# EAGLE board untitled (EAGLE 7.3.0)
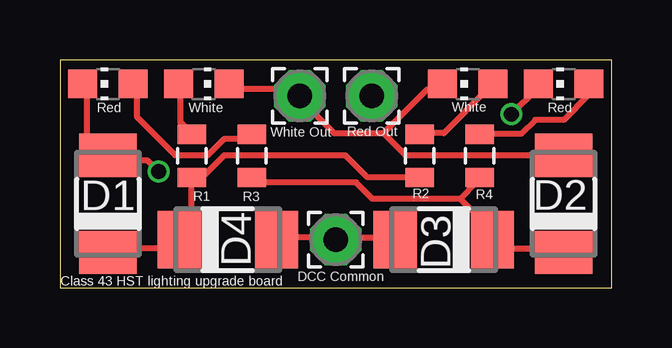
[diagram p0: board, top side]
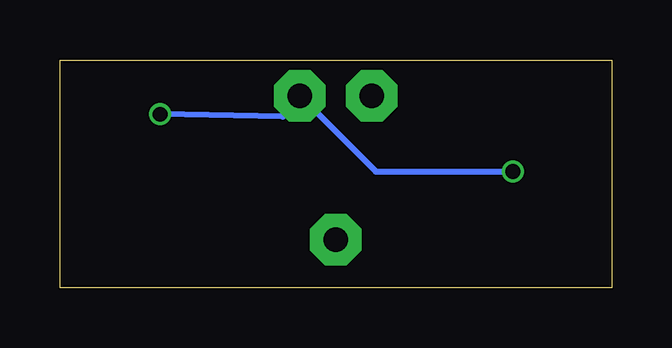
[diagram p1: board, bottom side, seen from below]

Size 23 x 9.5 mm. Coordinates in mm from the lower left corner, seen from the top.
Outline: 0,0 23,0 23,9.5 0,9.5 0,0
Copper layers (1*16): Top 0.035mm / dielectric 1.5mm / Bottom 0.035mm
Design rules "Seeed Fusion Design Rules": minimum track width 6mil, minimum drill 12mil, track to track 6mil, track to pad 6mil, pad to pad 6mil, via to via 6mil, smd to smd 0mil, copper to edge 10mil, drill to drill 10mil, minimum pad ring 10mil, minimum via ring 6mil, stop-mask expansion 2mil, vias tented up to drill 100mil, thermal gap 10mil

## Footprints (pad centres in the part's own frame; a part is rotated, then mirrored left to right if it is on the bottom)
DO-214AC = smd 1.8 x 2.4: A 2.025,0; C -2.025,0
CHIP-LED0805 = smd 1.2 x 1.2: A 0,-1.05; C 0,1.05
2,15/1,0 = drill 1.016 pad 2.159 octagon: 1 0,0
0805 = smd 0.8 x 1.2: 1 -0.9,0; 2 0.9,0

## Placement (x,y rotation side)
D1  [DO-214AC]  2,3.5 90 top
D2  [DO-214AC]  21,3.5 90 top
D3  [DO-214AC]  16,2 180 top
D4  [DO-214AC]  7,2 0 top
LED1  [CHIP-LED0805]  6,8.5 270 top
LED2  [CHIP-LED0805]  17,8.5 90 top
LED3  [CHIP-LED0805]  2,8.5 90 top
LED4  [CHIP-LED0805]  21,8.5 90 top
PAD1  [2,15/1,0]  13,8 0 top
PAD2  [2,15/1,0]  10,8 0 top
PAD3  [2,15/1,0]  11.5,2 0 top
R1  [0805]  5.5,5.5 90 top
R2  [0805]  15,5.5 90 top
R3  [0805]  8,5.5 90 top
R4  [0805]  17.5,5.5 90 top

## Library data of the parts
D1-D4 = diode
LED1-LED4 = led
PAD1-PAD3 = wirepad
R1-R4 = SparkFun

## Nets
N$1: D2.C D3.C R3.1 R4.1
N$2: D1.C D4.C R1.1 R2.1
N$4: LED3.A R3.2
N$5: LED4.A R4.2
N$6: D2.A LED1.C LED2.C PAD2.1
N$7: D3.A D4.A PAD3.1
N$8: LED2.A R2.2
N$9: LED1.A R1.2
RED_CATHODE: D1.A LED3.C LED4.C PAD1.1

## Tracks (layer width: path | path; a pad name or v marks a point on that pad's centre or on a via)
N$1
  Top 0.254: 16.69,3.7 13.03,3.7 12.34,4.39 8,4.39 R3.1 | 16.69,3.7 17.37,4.39 R4.1 | 16.69,3.7 17.83,2.56 17.83,2.1 D3.C 18.06,1.87 18.29,1.64 20.8,1.64 D2.C
N$2
  Top 0.254: R2.1 14.86,4.62 12.8,4.62 11.89,5.53 6.86,5.53 5.71,4.39 R1.1 5.49,4.39 5.49,2.56 5.03,2.1 D4.C 4.8,1.87 4.57,1.64 2.06,1.64 D1.C
N$4
  Top 0.254: R3.2 7.77,6.21 6.86,6.21 6.17,5.53 4.8,5.53 3.2,7.13 3.2,8.27 LED3.A
N$5
  Top 0.254: LED4.A 22.05,8.05 21,7 19.82,7 19.23,6.41 R4.2
N$6
  Top 0.254: LED1.C 7.09,8.27 9.6,8.27 9.83,8.04 PAD2.1 10.06,7.82 11.43,6.44 13.49,6.44 | 13.49,6.44 15.32,8.27 15.77,8.27 LED2.C | 13.49,6.44 14.4,5.53 20.8,5.53 D2.A
N$7
  Top 0.254: D4.A 9.14,2.1 11.43,2.1 PAD3.1 11.66,2.1 13.95,2.1 D3.A
N$8
  Top 0.254: R2.2 15.09,6.44 16,6.44 17.83,8.27 LED2.A
N$9
  Top 0.254: LED1.A 5.03,8.27 5.03,6.9 5.49,6.44 R1.2
RED_CATHODE  (via drill 0.61)
  Top 0.254: LED3.C 1.14,8.27 1.14,6.21 1.83,5.53 D1.A 2.06,5.3 3.66,5.3 v4.12,4.84 | v18.82,7.23 19.89,8.27 LED4.C
  Bottom 0.254: v18.82,7.23 13.72,7.13 13.03,7.82 PAD1.1 12.8,7.82 9.83,4.84 v4.12,4.84

## Text on the board
tPlace: Red | White | White | Red | White Out | Red Out | Class 43 HST lighting upgrade board | DCC Common